# EAGLE board CT_schematic (EAGLE 7.6.0)

Size 100 x 80 mm. Coordinates in mm from the lower left corner, seen from the top.
Outline: 0,0 100,0 100,80 0,80 0,0
Copper layers (1*16): Top 0.035mm / dielectric 1.5mm / Bottom 0.035mm
Design rules "default": minimum track width 10mil, minimum drill 24mil, track to track 8mil, track to pad 8mil, pad to pad 8mil, via to via 8mil, smd to smd 8mil, copper to edge 40mil, drill to drill 8mil, minimum pad ring 10mil, minimum via ring 8mil, stop-mask expansion 4mil, vias tented up to drill 0mil, thermal gap 10mil

## Footprints (pad centres in the part's own frame; a part is rotated, then mirrored left to right if it is on the bottom)
C0603 = smd 0.8 x 0.8: 1 -0.762,0; 2 0.762,0
C0402 = smd 0.5 x 0.5: 1 -0.508,0; 2 0.508,0
C0805 = smd 1.2 x 1.3: 1 -1.016,0; 2 1.016,0
EXV-9B = smd 2.718 x 1.778: 1 -2.108,0; 2 2.108,0
R0603 = smd 0.8 x 0.8: 1 -0.762,0; 2 0.762,0
C1210 = smd 1.2 x 2.5: 1 -1.524,0; 2 1.524,0
EXV-9H = smd 3.505 x 1.676: 1 -2.857,0; 2 2.857,0
L0603 = smd 0.8 x 0.8: 1 -0.762,0; 2 0.762,0
PJ-037B_PACKAGE = drill 3.7 square: 1 12,0 | drill 3.2 square: 2 6,0
LQFP100 = smd 0.3 x 1.2: 1 -6,-7.75; 2 -5.5,-7.75; 3 -5,-7.75; 4 -4.5,-7.75; 5 -4,-7.75; 6 -3.5,-7.75; 7 -3,-7.75; 8 -2.5,-7.75; 9 -2,-7.75; 10 -1.5,-7.75; 11 -1,-7.75; 12 -0.5,-7.75; 13 0,-7.75; 14 0.5,-7.75; 15 1,-7.75; 16 1.5,-7.75; 17 2,-7.75; 18 2.5,-7.75; 19 3,-7.75; 20 3.5,-7.75; 21 4,-7.75; 22 4.5,-7.75; 23 5,-7.75; 24 5.5,-7.75; 25 6,-7.75; 51 6,7.75; 52 5.5,7.75; 53 5,7.75; 54 4.5,7.75; 55 4,7.75; 56 3.5,7.75; 57 3,7.75; 58 2.5,7.75; 59 2,7.75; 60 1.5,7.75; 61 1,7.75; 62 0.5,7.75; 63 0,7.75; 64 -0.5,7.75; 65 -1,7.75; 66 -1.5,7.75; 67 -2,7.75; 68 -2.5,7.75; 69 -3,7.75; 70 -3.5,7.75; 71 -4,7.75; 72 -4.5,7.75; 73 -5,7.75; 74 -5.5,7.75; 75 -6,7.75 | smd 1.2 x 0.3: 26 7.75,-6; 27 7.75,-5.5; 28 7.75,-5; 29 7.75,-4.5; 30 7.75,-4; 31 7.75,-3.5; 32 7.75,-3; 33 7.75,-2.5; 34 7.75,-2; 35 7.75,-1.5; 36 7.75,-1; 37 7.75,-0.5; 38 7.75,0; 39 7.75,0.5; 40 7.75,1; 41 7.75,1.5; 42 7.75,2; 43 7.75,2.5; 44 7.75,3; 45 7.75,3.5; 46 7.75,4; 47 7.75,4.5; 48 7.75,5; 49 7.75,5.5; 50 7.75,6; 76 -7.75,6; 77 -7.75,5.5; 78 -7.75,5; 79 -7.75,4.5; 80 -7.75,4; 81 -7.75,3.5; 82 -7.75,3; 83 -7.75,2.5; 84 -7.75,2; 85 -7.75,1.5; 86 -7.75,1; 87 -7.75,0.5; 88 -7.75,0; 89 -7.75,-0.5; 90 -7.75,-1; 91 -7.75,-1.5; 92 -7.75,-2; 93 -7.75,-2.5; 94 -7.75,-3; 95 -7.75,-3.5; 96 -7.75,-4; 97 -7.75,-4.5; 98 -7.75,-5; 99 -7.75,-5.5; 100 -7.75,-6
SAMTEC_FTSH-105-01-L-DV-K = smd 0.762 x 2.794: 1 -2.54,-2.032; 2 -2.54,2.032; 3 -1.27,-2.032; 4 -1.27,2.032; 5 0,-2.032; 6 0,2.032; 7 1.27,-2.032; 8 1.27,2.032; 9 2.54,-2.032; 10 2.54,2.032
MOLEX_47219-2001 = smd 0.8 x 1.5: 1 3.2,-2.1; 2 2.1,-2.1; 3 1,-2.1; 4 -0.1,-2.1; 5 -1.2,-2.1; 6 -2.3,-2.1; 7 -3.4,-2.1; 8 -4.5,-2.1 | smd 1.5 x 2.05: G1 6.875,-4.7; G2 6.875,3.6; G3 -6.875,3.6; G4 -6.875,-4.7
RFM75-S = smd 0.85 x 1.6: 1 1.7,0.8; 2 2.97,0.8; 3 4.24,0.8; 4 5.51,0.8; 5 6.78,0.8; 6 8.05,0.8; 7 9.32,0.8; 8 10.59,0.8
USON-8 = smd 0.3 x 0.4: 1 0,0; 2 0.5,0; 3 1,0; 4 1.5,0; 5 1.5,2.4; 6 1,2.4; 7 0.5,2.4; 8 0,2.4 | smd 1.65 x 0.25: 9 0.75,1.2
ABS07-32.768KHZ-7-T = smd 1.1 x 2.4: 1 -2.5,0; 2 0,0
ABLS-25.000MHZ-B2F-T = smd 5.6 x 2.8: 1 -3.81,0; 2 5.69,0
LP2954 = smd 1.6 x 0.6: 1 -2.475,1.905 | smd 1.55 x 0.6: 2 -2.475,0.635; 3 -2.475,-0.635; 4 -2.475,-1.905; 5 2.475,-1.905; 6 2.475,-0.635; 7 2.475,0.635; 8 2.475,1.905
WSON-8 = smd 0.3 x 0.6: 1 -0.75,0; 2 0.05,0; 3 0.85,0; 4 1.65,0; 5 1.65,3.8; 6 0.85,3.8; 7 0.05,3.8; 8 -0.75,3.8 | smd 3 x 2.6: PAD 0.45,1.9
SON-6 = smd 0.55 x 0.3: 1 -0.355,0.5 | smd 0.52 x 0.3: 2 -0.37,0; 3 -0.37,-0.5; 4 0.37,-0.5; 5 0.37,0; 6 0.37,0.5
RUT0012A = smd 0.7 x 0.2: 1 -0.7,0.8; 2 -0.7,0.4; 3 -0.7,0; 4 -0.7,-0.4; 5 -0.7,-0.8; 7 0.7,-0.8; 8 0.7,-0.4; 9 0.7,0; 10 0.7,0.4; 11 0.7,0.8 | smd 0.2 x 0.7: 6 0,-0.85; 12 0,0.85
SW_4-1437565-2 = smd 1.4 x 2.1: 1 -2.23,4.55; 2 -2.23,-4.55; 3 2.23,4.55; 4 2.23,-4.55
LGM67K-G1J2-24-Z = smd 0.8 x 1.4: A -2,0; C 0,0
NC7SZ125M5X = smd 1.3 x 0.7: 1 -1.3,0.95; 2 -1.3,0; 3 -1.3,-0.95; 4 1.3,-0.95; 5 1.3,0.95

## Placement (x,y rotation side)
C1  1e-06  [C0603]  -76.2,69.85 0 top  (outside the outline)
C2  1e-07  [C0603]  -15.24,74.93 0 top  (outside the outline)
C3  1e-07  [C0603]  -19.05,74.93 0 top  (outside the outline)
C4  1e-07  [C0603]  -22.86,74.93 0 top  (outside the outline)
C5  1e-07  [C0603]  -26.67,74.93 0 top  (outside the outline)
C6  1e-07  [C0603]  -30.48,74.93 0 top  (outside the outline)
C7  1e-07  [C0603]  -34.29,74.93 0 top  (outside the outline)
C8  4.7e-06  [C0603]  -64.77,69.85 0 top  (outside the outline)
C9  2.2e-06  [C0603]  -68.58,69.85 0 top  (outside the outline)
C10  2.2e-06  [C0603]  -72.39,69.85 0 top  (outside the outline)
C11  1e-08  [C0603]  -38.1,74.93 0 top  (outside the outline)
C12  1e-06  [C0603]  -41.91,74.93 0 top  (outside the outline)
C13  1e-11  [C0402]  -68.58,74.93 0 top  (outside the outline)
C14  1e-11  [C0402]  -72.39,74.93 0 top  (outside the outline)
C15  1e-11  [C0402]  -76.2,74.93 0 top  (outside the outline)
C16  1e-11  [C0402]  -15.24,80.01 0 top  (outside the outline)
C17  1e-07  [C0402]  -19.05,80.01 0 top  (outside the outline)
C18  1e-07  [C0402]  -22.86,80.01 0 top  (outside the outline)
C19  1e-05  [C0805]  -45.72,58.42 0 top  (outside the outline)
C20  1e-07  [C0402]  -26.67,80.01 0 top  (outside the outline)
C21  1e-06  [C0603]  -45.72,74.93 0 top  (outside the outline)
C22  1e-07  [C0402]  -30.48,80.01 0 top  (outside the outline)
C23  1e-06  [EXV-9B]  -16.51,58.42 0 top  (outside the outline)
C24  2.2e-06  [EXV-9B]  -25.4,58.42 0 top  (outside the outline)
C25  8e-07  [R0603]  -49.53,74.93 0 top  (outside the outline)
C26  1e-05  [C1210]  -69.85,52.07 0 top  (outside the outline)
C27  1e-07  [C0402]  -34.29,80.01 0 top  (outside the outline)
C28  0.0001  [EXV-9H]  -53.34,43.18 0 top  (outside the outline)
C29  0.0001  [EXV-9H]  -64.77,43.18 0 top  (outside the outline)
C30  1e-08  [C0402]  -38.1,80.01 0 top  (outside the outline)
C31  1e-07  [C0402]  -41.91,80.01 0 top  (outside the outline)
C32  1e-08  [C0402]  -45.72,80.01 0 top  (outside the outline)
C33  1e-07  [C0402]  -49.53,80.01 0 top  (outside the outline)
C34  1e-08  [C0402]  -53.34,80.01 0 top  (outside the outline)
C35  1e-08  [C0402]  -57.15,80.01 0 top  (outside the outline)
F1  240.0  [L0603]  -53.34,74.93 0 top  (outside the outline)
J1  PJ-037B  [PJ-037B_PACKAGE]  -57.15,30.48 0 top  (outside the outline)
R2  1000.0  [R0603]  -57.15,74.93 0 top  (outside the outline)
R4  4700.0  [R0603]  -60.96,74.93 0 top  (outside the outline)
R5  10000.0  [R0603]  -71.12,64.77 0 top  (outside the outline)
R6  10000.0  [R0603]  -76.2,64.77 0 top  (outside the outline)
R7  10000.0  [R0603]  -15.24,69.85 0 top  (outside the outline)
R8  10000.0  [R0603]  -20.32,69.85 0 top  (outside the outline)
R9  10000.0  [R0603]  -25.4,69.85 0 top  (outside the outline)
R10  5.0  [R0603]  -64.77,74.93 0 top  (outside the outline)
R11  100000.0  [R0603]  -50.8,58.42 0 top  (outside the outline)
R12  100000.0  [R0603]  -55.88,58.42 0 top  (outside the outline)
R13  100000.0  [R0603]  -60.96,58.42 0 top  (outside the outline)
R14  100000.0  [R0603]  -66.04,58.42 0 top  (outside the outline)
R15  100000.0  [R0603]  -71.12,58.42 0 top  (outside the outline)
R16  100000.0  [R0603]  -76.2,58.42 0 top  (outside the outline)
R17  10000.0  [R0603]  -30.48,69.85 0 top  (outside the outline)
R18  10000.0  [R0603]  -35.56,69.85 0 top  (outside the outline)
R19  100000.0  [R0603]  -15.24,64.77 0 top  (outside the outline)
R20  100000.0  [R0603]  -20.32,64.77 0 top  (outside the outline)
R21  100000.0  [R0603]  -25.4,64.77 0 top  (outside the outline)
R22  100000.0  [R0603]  -30.48,64.77 0 top  (outside the outline)
R23  100000.0  [R0603]  -35.56,64.77 0 top  (outside the outline)
R24  47000.0  [R0603]  -40.64,69.85 0 top  (outside the outline)
R25  100000.0  [R0603]  -40.64,64.77 0 top  (outside the outline)
R26  100000.0  [R0603]  -45.72,64.77 0 top  (outside the outline)
R27  91000.0  [R0603]  -45.72,69.85 0 top  (outside the outline)
R28  100000.0  [R0603]  -50.8,64.77 0 top  (outside the outline)
R29  10000.0  [R0603]  -50.8,69.85 0 top  (outside the outline)
R30  10000.0  [R0603]  -55.88,69.85 0 top  (outside the outline)
R31  82000.0  [R0603]  -60.96,69.85 0 top  (outside the outline)
R32  300000.0  [R0603]  -55.88,64.77 0 top  (outside the outline)
R33  120000.0  [R0603]  -60.96,64.77 0 top  (outside the outline)
R34  200000.0  [R0603]  -66.04,64.77 0 top  (outside the outline)
U1  STM32F412VGT6  [LQFP100]  -39.37,8.89 0 top  (outside the outline)
U2  FTSH-105-01-L-DV-K  [SAMTEC_FTSH-105-01-L-DV-K]  -35.56,31.75 0 top  (outside the outline)
U3  0472192001  [MOLEX_47219-2001]  -58.42,8.89 0 top  (outside the outline)
U4  RFM75-S  [RFM75-S]  -26.67,3.81 0 top  (outside the outline)
U5  SST26WF040BT-104I/NP  [USON-8]  -60.96,78.74 0 top  (outside the outline)
U6  ABS07-32.768KHZ-7-T  [ABS07-32.768KHZ-7-T]  -49.53,52.07 0 top  (outside the outline)
U7  ABLS-25.000MHZ-B2F-T  [ABLS-25.000MHZ-B2F-T]  -26.67,52.07 0 top  (outside the outline)
U8  LP2954AIMX/NOPB  [LP2954]  -25.4,43.18 0 top  (outside the outline)
U9  LP2951ACSDX/NOPB  [WSON-8]  -45.72,41.91 0 top  (outside the outline)
U10  TPS3895ADRYR  [SON-6]  -13.97,83.82 0 top  (outside the outline)
U11  LSF0204DRUTR  [RUT0012A]  -74.93,80.01 0 top  (outside the outline)
U12  4-1437565-2  [SW_4-1437565-2]  -73.66,29.21 0 top  (outside the outline)
U13  Q65110A2395  [LGM67K-G1J2-24-Z]  -58.42,52.07 0 top  (outside the outline)
U14  nc7sz125m5x  [NC7SZ125M5X]  -33.02,58.42 0 top  (outside the outline)
U15  nc7sz125m5x  [NC7SZ125M5X]  -39.37,58.42 0 top  (outside the outline)

## Library data of the parts
C1-C35 F1 J1 R2 R4-R34 U1-U15 = circuit_tree

## Nets
CLK_CRYSTAL_U1_8: C13.1 U1.8 U6.1
CLK_CRYSTAL_U1_9: C14.1 U1.9 U6.2
CLK_CRYSTAL_U1_12: C15.1 U1.12 U7.1
CLK_CRYSTAL_U1_13: C16.1 U1.13 U7.2
GND: C1.2 C2.2 C3.2 C4.2 C5.2 C6.2 C7.2 C8.2 C9.2 C10.2 C11.2 C12.2 C13.2 C14.2 C15.2 C16.2 C17.2 C18.2 C19.2 C20.2 C21.2 C22.2 C23.2 C24.2 C25.2 C26.2 C27.2 C28.2 C29.2 C30.2 C31.2 C32.2 C33.2 C34.2 C35.2 J1.2 R2.2 R5.2 R9.2 R10.2 R25.2 R28.2 R31.2 R33.2 U1.10 U1.20 U1.27 U1.49 U1.74 U1.99 U2.3 U2.5 U3.6 U3.G1 U3.G2 U3.G3 U3.G4 U4.1 U5.4 U5.9 U8.4 U9.3 U9.4 U9.PAD U10.2 U11.6 U13.C U14.2 U14.3 U15.1 U15.3
NET_U1_14: R4.1 U1.14 U15.4
NET_U1_22: C11.1 C12.1 F1.1 U1.21 U1.22
NET_U1_48: C9.1 U1.48
NET_U1_73: C10.1 U1.73
NET_U1_94: R5.1 U1.94
NET_U1_97: U13.A
NET_U1_98: U12.3 U12.4
NET_U2_9: R10.1 U2.9
NET_U4_3: R17.1 U4.3
NET_U8_3: R23.1 U8.3
NET_U8_5: R22.1 U8.5
NET_U8_7: R24.2 R25.1 U8.7
NET_U9_5: R26.1 U9.5
NET_U9_7: R27.2 R28.1 U9.7
NET_U10_1: R30.1 R31.1 U10.1
NET_U10_3: R32.2 R33.1 U10.3
NET_U10_4: R29.1 U10.4 U14.4 U15.2
NET_U11_12: R34.1 U11.12
NET_U12_1: R2.1 U12.1 U12.2
PROC_QUADSPI_BK1_IO0: U1.58 U5.5
PROC_QUADSPI_BK1_IO1: U1.59 U5.2
PROC_QUADSPI_BK1_IO2: R20.1 U1.1 U5.3
PROC_QUADSPI_BK1_IO3: R21.1 U1.24 U5.7
PROC_QUADSPI_BK1_NCS: R19.1 U1.92 U5.1
PROC_QUADSPI_CLK: U1.36 U5.6
PROC_SDIO_CK: R12.1 U1.54 U3.5
PROC_SDIO_CMD: R11.1 U1.83 U3.3
PROC_SDIO_D0: R13.1 U1.65 U3.7
PROC_SDIO_D1: R14.1 U1.66 U3.8
PROC_SDIO_D2: R15.1 U1.68 U3.1
PROC_SDIO_D3: R16.1 U1.79 U3.2
PROC_SPI1_MISO_TOIOBUF: U11.3
PROC_SPI1_MISO_TOXCVR: U4.7 U11.9
PROC_SPI1_MOSI_TOIOBUF: U11.2
PROC_SPI1_MOSI_TOXCVR: U4.6 U11.10
PROC_SPI1_NSS_TOIOBUF: U11.5
PROC_SPI1_NSS_TOXCVR: R18.1 U4.4 U11.7
PROC_SPI1_SCK_TOIOBUF: U11.4
PROC_SPI1_SCK_TOXCVR: U4.5 U11.8
PROC_SYS_JTCK_SWCLK: R9.1 U1.76 U2.4
PROC_SYS_JTDI: R7.1 U1.77 U2.8
PROC_SYS_JTDO_SWO: U1.89 U2.6
PROC_SYS_JTMS_SWDIO: R8.1 U1.72 U2.2
RST_OUT_U2_JTAG_RST_B: R6.1 U2.10 U14.1
VCC_S1_12V3: C23.1 C25.1 C28.1 C29.1 J1.1 R23.2 U8.8 U9.8
VCC_TIER1_1V8: C1.1 C2.1 C3.1 C4.1 C5.1 C6.1 C7.1 C8.1 C17.1 C18.1 C19.1 C22.1 C24.1 C27.1 C32.1 C33.1 C34.1 C35.1 F1.2 R4.2 R6.2 R7.2 R8.2 R11.2 R12.2 R13.2 R14.2 R15.2 R16.2 R19.2 R20.2 R21.2 R22.2 R24.1 R29.2 R30.2 R32.1 R34.2 U1.6 U1.11 U1.19 U1.28 U1.50 U1.75 U1.100 U2.1 U3.4 U5.8 U8.1 U10.6 U11.1 U14.5 U15.5
VCC_TIER1_2V5: C20.1 C21.1 C26.1 C30.1 C31.1 R17.2 R18.2 R26.2 R27.1 U4.2 U9.1 U11.11

## Tracks (layer width: path | path; a pad name or v marks a point on that pad's centre or on a via)
CLK_CRYSTAL_U1_8  (2 unrouted)
CLK_CRYSTAL_U1_9  (2 unrouted)
CLK_CRYSTAL_U1_12  (2 unrouted)
CLK_CRYSTAL_U1_13  (2 unrouted)
GND  (70 unrouted)
NET_U1_14  (2 unrouted)
NET_U1_22  (4 unrouted)
NET_U1_48  (1 unrouted)
NET_U1_73  (1 unrouted)
NET_U1_94  (1 unrouted)
NET_U1_98  (1 unrouted)
NET_U2_9  (1 unrouted)
NET_U4_3  (1 unrouted)
NET_U8_3  (1 unrouted)
NET_U8_5  (1 unrouted)
NET_U8_7  (2 unrouted)
NET_U9_5  (1 unrouted)
NET_U9_7  (2 unrouted)
NET_U10_1  (2 unrouted)
NET_U10_3  (2 unrouted)
NET_U10_4  (3 unrouted)
NET_U11_12  (1 unrouted)
NET_U12_1  (2 unrouted)
PROC_QUADSPI_BK1_IO0  (1 unrouted)
PROC_QUADSPI_BK1_IO1  (1 unrouted)
PROC_QUADSPI_BK1_IO2  (2 unrouted)
PROC_QUADSPI_BK1_IO3  (2 unrouted)
PROC_QUADSPI_BK1_NCS  (2 unrouted)
PROC_QUADSPI_CLK  (1 unrouted)
PROC_SDIO_CK  (2 unrouted)
PROC_SDIO_CMD  (2 unrouted)
PROC_SDIO_D0  (2 unrouted)
PROC_SDIO_D1  (2 unrouted)
PROC_SDIO_D2  (2 unrouted)
PROC_SDIO_D3  (2 unrouted)
PROC_SPI1_MISO_TOXCVR  (1 unrouted)
PROC_SPI1_MOSI_TOXCVR  (1 unrouted)
PROC_SPI1_NSS_TOXCVR  (2 unrouted)
PROC_SPI1_SCK_TOXCVR  (1 unrouted)
PROC_SYS_JTCK_SWCLK  (2 unrouted)
PROC_SYS_JTDI  (2 unrouted)
PROC_SYS_JTDO_SWO  (1 unrouted)
PROC_SYS_JTMS_SWDIO  (2 unrouted)
RST_OUT_U2_JTAG_RST_B  (2 unrouted)
VCC_S1_12V3  (7 unrouted)
VCC_TIER1_1V8  (52 unrouted)
VCC_TIER1_2V5  (11 unrouted)